# EAGLE board Pololu Magnetic Encoder (AS5035) (EAGLE 6.3)
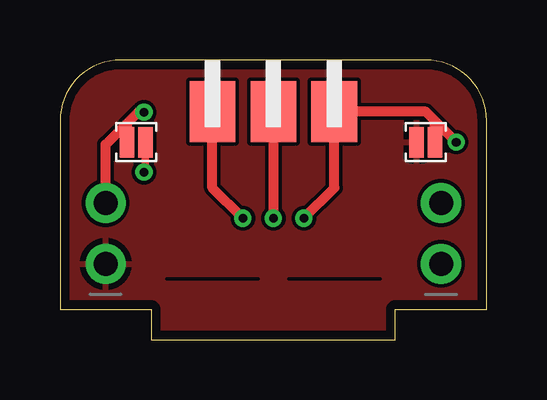
[diagram p0: board, top side]
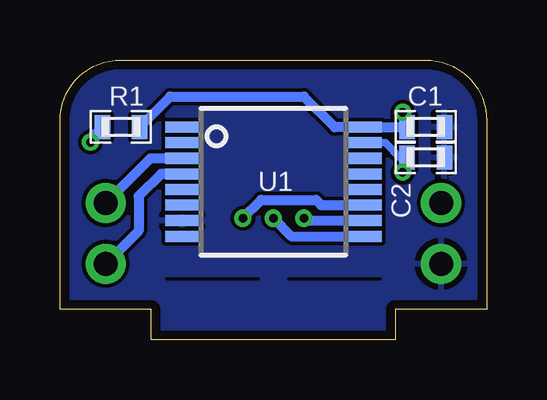
[diagram p1: board, bottom side, seen from below]

Size 17.78 x 11.68 mm. Coordinates in mm from the lower left corner, seen from the top.
Outline: 0,1.27 3.81,1.27 3.81,0 13.97,0 13.97,1.27 17.78,1.27 17.78,9.14 arc90 15.24,11.68 2.54,11.68 arc90 0,9.14 0,1.27
Copper layers (1*16): Top 0.0356mm / dielectric 1.5011mm / Bottom 0.0356mm
Design rules "default": minimum track width 6mil, minimum drill 13mil, track to track 6mil, track to pad 6mil, pad to pad 6mil, via to via 6mil, smd to smd 6mil, copper to edge 15mil, drill to drill 6mil, minimum pad ring 7mil, minimum via ring 7mil, stop-mask expansion 4mil, vias tented up to drill 16mil, thermal gap 10mil
tRestrict: 2 lines
bRestrict: 2 lines

## Footprints (pad centres in the part's own frame; a part is rotated, then mirrored left to right if it is on the bottom)
0603 = smd 0.65 x 1: 1 -0.775,0; 2 0.775,0
2.LRG.PASTE = smd 0.61 x 1.27: 1 -0.381,0; 2 0.381,0
1X02_ROUND = drill 1 pad 1.676: 1 -1.27,0; 2 1.27,0
SSOP16 = smd 0.46 x 1.43: 1 -2.275,-3.795; 2 -1.625,-3.795; 3 -0.975,-3.795; 4 -0.325,-3.795; 5 0.325,-3.795; 6 0.975,-3.795; 7 1.625,-3.795; 8 2.275,-3.795; 9 2.275,3.795; 10 1.625,3.795; 11 0.975,3.795; 12 0.325,3.795; 13 -0.325,3.795; 14 -0.975,3.795; 15 -1.625,3.795; 16 -2.275,3.795
1X3.SIDE = smd 1.905 x 2.54: 1 -2.54,-2.159; 2 0,-2.159; 3 2.54,-2.159

## Placement (x,y rotation side)
C1  .1uF  [0603]  2.54,8.89 0 bottom
C2  2.2uF  [0603]  2.54,7.62 0 bottom
J1  [2.LRG.PASTE]  3.17,8.26 180 top
J2  [2.LRG.PASTE]  15.24,8.26 0 top
JP1  [1X02_ROUND]  1.91,4.45 90 top
JP2  [1X02_ROUND]  15.88,4.45 90 top
R1  100k  [0603]  15.24,8.89 180 bottom
U1  AS5035  [SSOP16]  8.89,6.6 270 bottom
U$9  1X3.SIDE  [1X3.SIDE]  8.89,11.68 0 top

## Library data of the parts
C1 C2 R1 = .standardparts
J1 J2 = .solderjumper
JP1 JP2 = microbuilder
U1 = austriamicrosystems
U$9 = .standardheaders

## Nets
!CS: J2.2 R1.2 U1.11 U$9.3
A: JP2.2 U1.3
B: JP2.1 U1.4
CLK: U1.10 U$9.1
DO: U1.9 U$9.2
GND: C1.2 C2.2 J2.1 JP1.1 U1.7
N$4: C2.1 J1.1 U1.15
VIN: C1.1 J1.2 JP1.2 R1.1 U1.16

## Tracks (layer width: path | path; a pad name or v marks a point on that pad's centre or on a via)
!CS  (via drill 0.36)
  Top 0.406: v10.16,5.08 11.43,6.35 U$9.3 15.24,9.53 15.62,9.14 | v16.51,8.26 15.62,9.14 | J2.2 15.62,9.14
  Bottom 0.406: v10.16,5.08 9.4,5.84 7.11,5.84 6.9,5.63 U1.11 | R1.2 16.51,8.39 v16.51,8.26
A
  Bottom 0.406: U1.3 14.01,7.58 JP2.2
B
  Bottom 0.406: U1.4 13.57,6.93 14.5,6 14.5,4.55 JP2.1
CLK  (via drill 0.36)
  Top 0.406: 6.35,8.89 U$9.1 6.35,6.35 v7.62,5.08
  Bottom 0.406: v7.62,5.08 7.52,4.98 U1.10
DO  (via drill 0.36)
  Top 0.406: U$9.2 v8.89,5.08
  Bottom 0.406: v8.89,5.08 8.14,4.33 U1.9
GND
  pour Bottom (rank 6): 0,0 17.78,0 17.78,11.68 0,11.68
  pour Top (rank 6): 0,0 17.78,0 17.78,11.68 0,11.68
N$4  (via drill 0.36)
  Top 0.305: J1.1 3.56,7.06 v3.5,7
  Bottom 0.305: v3.5,7 3.31,7.18 C2.1 3.62,7.62 4.23,8.23 U1.15
VIN  (via drill 0.36)
  Top 0.406: J1.2 2.79,9.04 | JP1.2 1.91,8.15 2.79,9.04 | 2.79,9.04 3.25,9.5 v3.5,9.5
  Bottom 0.406: v3.5,9.5 3.31,9.31 C1.1 5.08,8.89 U1.16 6.34,8.88 7.62,10.16 13.2,10.16 R1.1

## Text on the board
tDocu: 3.3v | !SPI | Cruz Monrreal II | innovativemaker.com
bDocu: DO | CLK | !CS